# Altium PCB ES_Class6C_2L.PcbDoc
Units mm, origin at the board's own origin, x right, y up, seen from the top; angles counter-clockwise.
Board outline 254 x 254 mm, 2 copper layers (Top Layer, Bottom Layer), stack 1.5 mm thick; 279 components, 144 nets, 798 pads, 0 vias.
Unrouted connection lines stored in the file: 640.
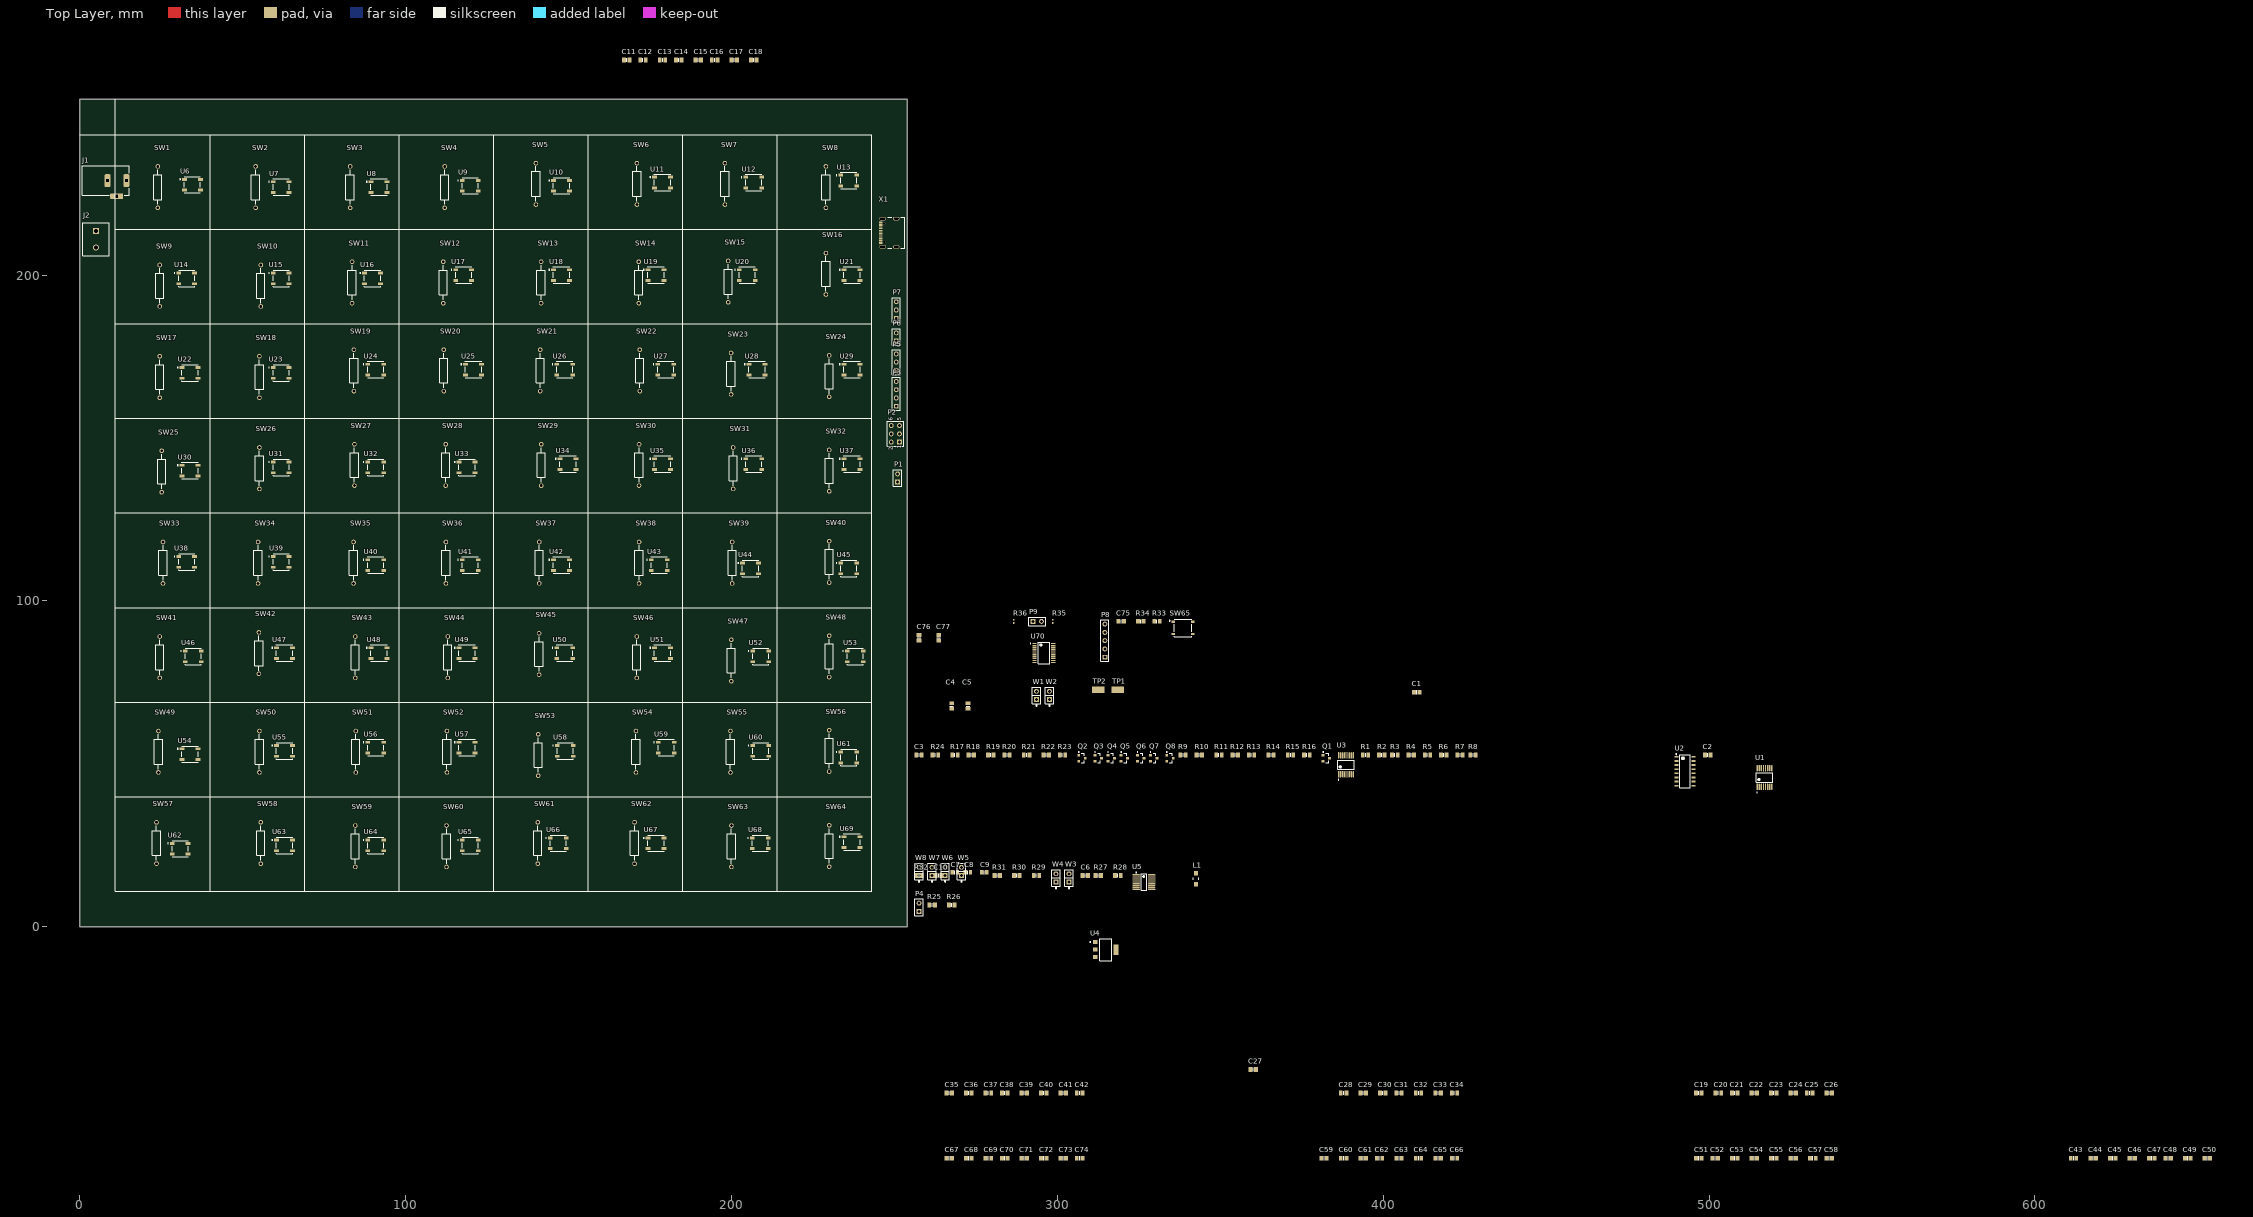
[diagram p0: Top Layer view]
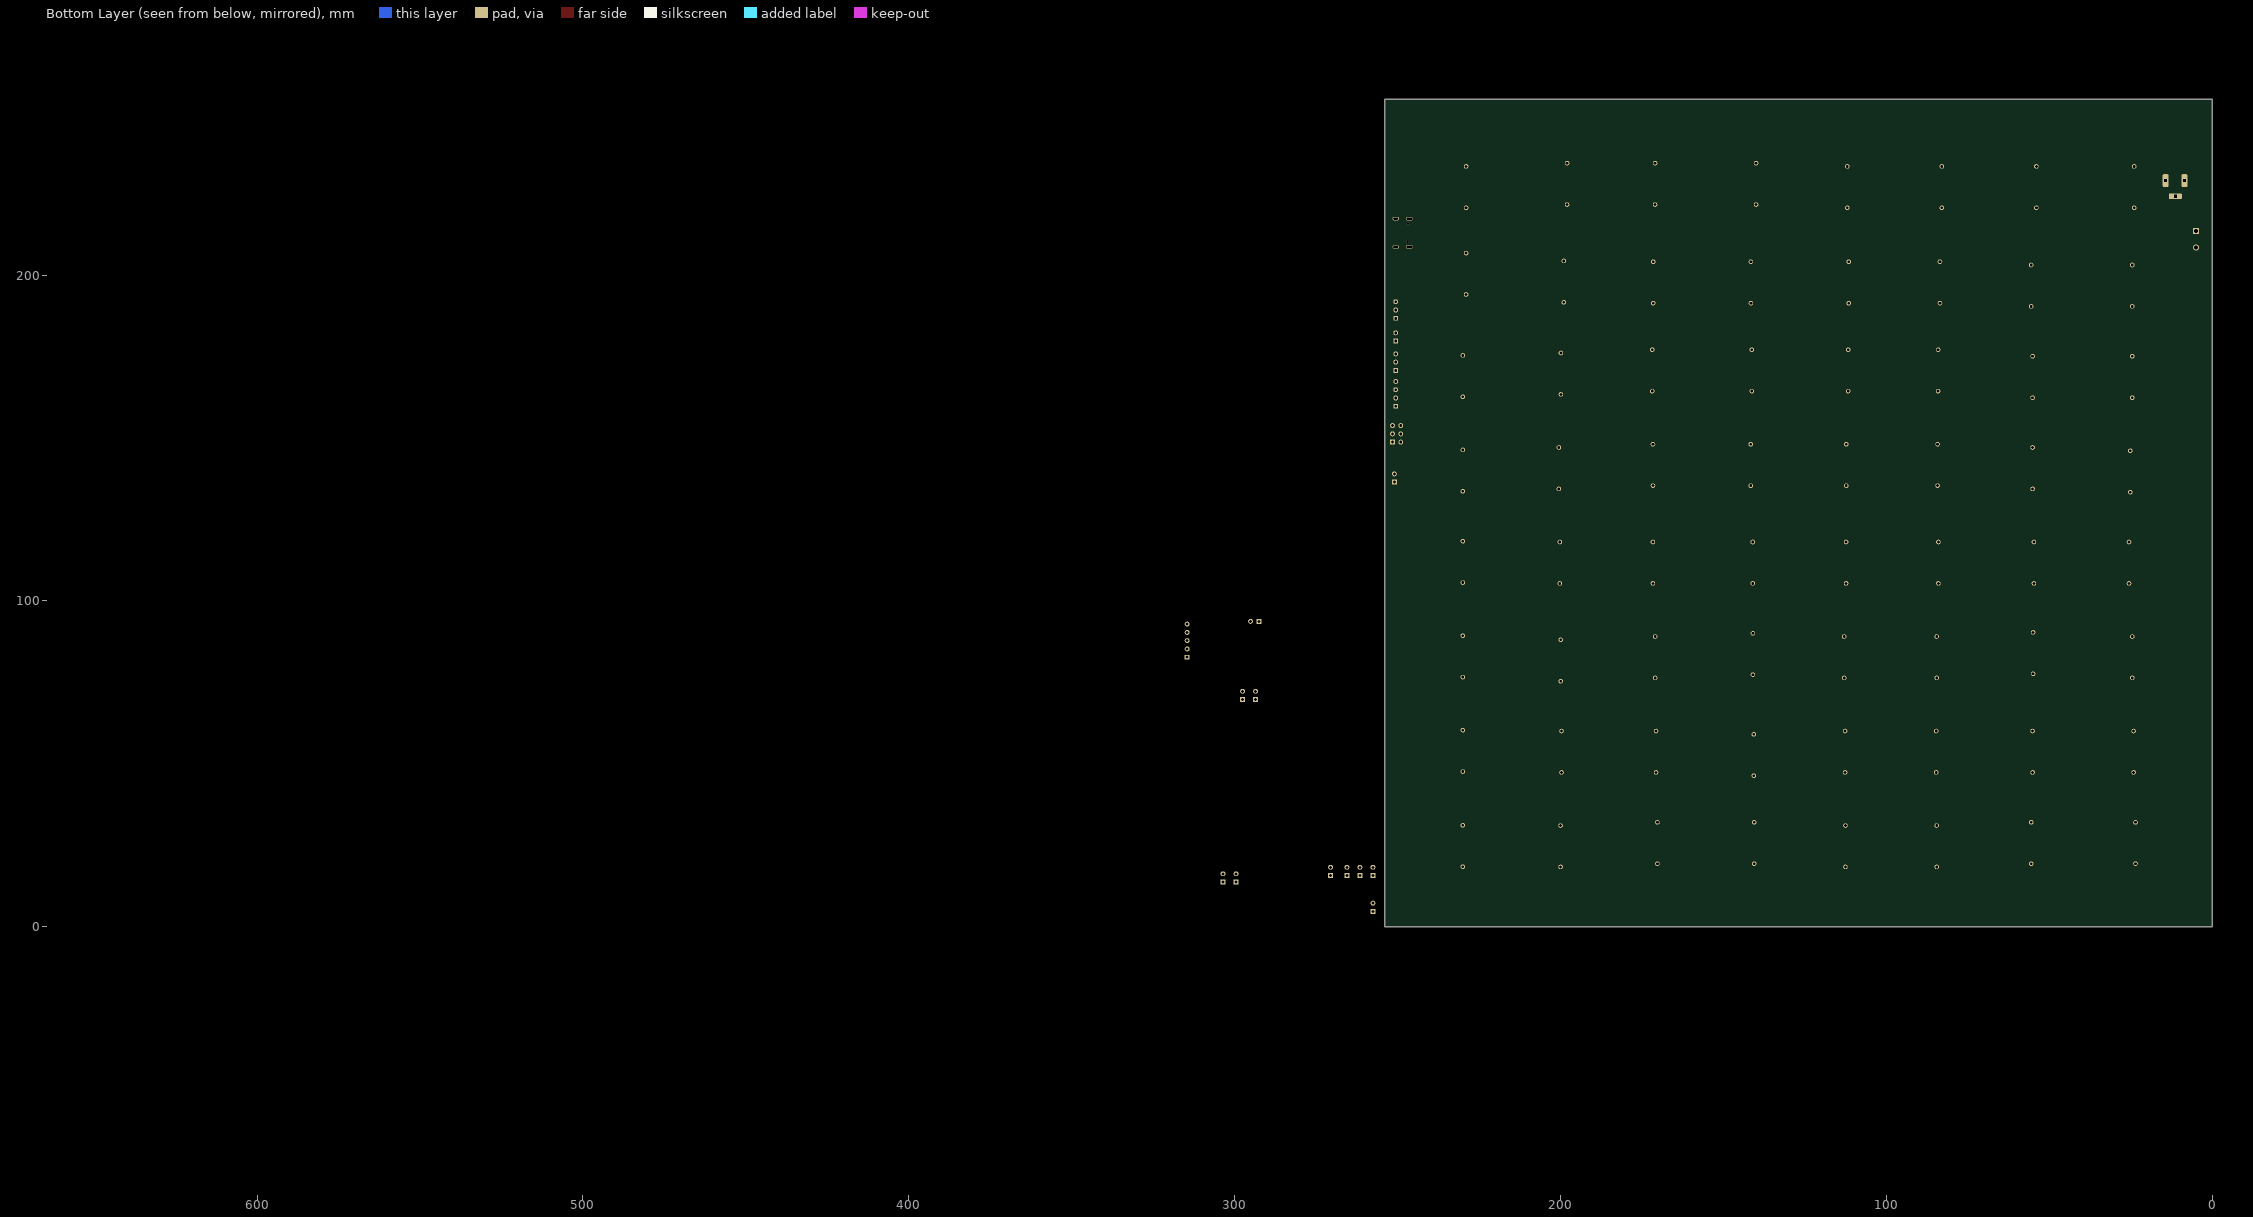
[diagram p1: Bottom Layer view, seen from below]

## Layer stack, top to bottom
Top Solder: solder mask 0.0102, Solder Resist, Dk 3.5
Top Layer: signal copper 0.035
Dielectric 1: prepreg 0.36, PP-001, Dk 3.9
Dielectric1: core 0.71, FR-4, Dk 4.8
Dielectric 2: prepreg 0.36, PP-001, Dk 3.9
Bottom Layer: signal copper 0.035
Bottom Solder: solder mask 0.0102, Solder Resist, Dk 3.5

## Board outline
0,0 254,0 254,254 0,254

## Design rules (kind name [scope] priority, off if disabled: settings)
BoardOutlineClearance [All] p1 off: gap=0.25 ignorepadtopadclearanceinfootprint=FALSE except(0: Arc-SplitContinuation Track-SplitContinuation SMDPad-SplitContinuation THPad-SplitContinuation Via-SplitContinuation Fill-SplitContinuation Poly-SplitContinuation Region-SplitContinuation Text-SplitContinuation)
Clearance Clearance-xPP-xTP-xTT [All] p1: gap=0.151 ignorepadtopadclearanceinfootprint=FALSE
ComponentClearance [All] p1: gap=0.25 collisioncheckmode=3 verticalgap=0.25 showdistances=FALSE
DiffPairsRouting [All] p1: maxlimit=0.25 minlimit=0.25 mostfreqgap=0.25 toplayer_minwidth=0.2 toplayer_maxwidth=0.381 toplayer_prefwidth=0.381 bottomlayer_minwidth=0.2 bottomlayer_maxwidth=0.381 bottomlayer_prefwidth=0.381 maxuncoupledlength=12.5
Height [All] p1: minheight=0 maxheight=25 prefheight=12.5
HoleSize HoleSize-PTH [All] p1: absolutevalues=TRUE maxlimit=10 minlimit=0.25 maxpercent=80.000 minpercent=20.000
HoleToHoleClearance [All] p1: gap=0.35 allowstackedmicrovias=TRUE
MinimumAnnularRing "Minimum IAR  >0.45mm" [((ObjectKind = 'Pad') OR (ObjectKind = 'Via')) And (Layer = 'MultiLayer') And (HoleDiameter > AsMM(0.45))] p1: minimumring=0.175 // minimum inner annular ring for pads > 0.45mm finished hole size
MinimumAnnularRing "Minimum IAR <=0.45mm" [((ObjectKind = 'Pad') OR (ObjectKind = 'Via')) And (Layer = 'MultiLayer') And (HoleDiameter <= AsMM(0.45))] p2: minimumring=0.175 // minimum inner annular ring for pads <= 0.45mm finished hole size
MinimumSolderMaskSliver [All] p1: minsoldermaskwidth=0.08
PasteMaskExpansion [All] p1: expansion=-0.025
PlaneClearance PlaneClearance-IPI [All] p1: clearance=0.25
PlaneConnect [All] p1: planeconnectstyle=Relief reliefexpansion=0.175 reliefentries=4 reliefconductorwidth=0.2 reliefairgap=0.2
PolygonConnect DirectVia [All vs IsNamedPolygon('GND_L01_P005') Or IsNamedPolygon('+3V3_L02_P000') Or IsNamedPolygon('GND_L03_P006') Or IsNamedPolygon('GND_L04_P008')] p1: thpad.connectstyle=Relief thpad.reliefconductorwidth=0.3 thpad.reliefentries=4 thpad.polygonreliefangle="90 Angle" thpad.airgapwidth=0.254 smdpad.connectstyle=Relief smdpad.reliefconductorwidth=0.3 smdpad.reliefentries=4 smdpad.polygonreliefangle="90 Angle" smdpad.airgapwidth=0.254 via.connectstyle=Direct via.reliefconductorwidth=0.254 via.reliefentries=4 via.polygonreliefangle="90 Angle" via.airgapwidth=0.254
PolygonConnect PolygonConnect-xTW [All] p2: connectstyle=Relief reliefconductorwidth=0.3 reliefentries=4 polygonreliefangle="90 Angle" airgapwidth=0.2
RoutingCorners [All] p1: cornerstyle=45-Degree minsetback=2.5 maxsetback=2.5
RoutingVias RoutingViasES [All] p1: holewidth=0.3 width=0.65 viastyle="Through Hole" minholewidth=0.25 minwidth=0.61 maxholewidth=0.45 maxwidth=0.8 // finishet hole size <= 0.45mm
SilkToSilkClearance [All] p1 off: silktosilkclearance=0.2
SilkToSolderMaskClearance SilkscreenOverComponentPads [IsPad] p1: minsilkscreentomaskgap=0.2 clearancetoexposedcopper=TRUE
SolderMaskExpansion [All] p1: expansion=0 istentingtop=FALSE
UnRoutedNet [All] p1: checkbadconnections=TRUE
Width Width-xTW [All] p1: maxlimit=1.5 minlimit=0.15 preferedwidth=0.2
17 further rules are at their usual default settings.

## Classes and differential pairs
component class U_uc: C75 P9 R34 R35 R36 SW65 U70 W5 W6 W7 W8
component class U_supply: C4 C5 J1 J2 P1 TP1 TP2 U4 W1 W2
component class U_matrix: C1 C2 C3 Q1 Q2 Q3 Q4 Q5 Q6 Q7 Q8 R1 R2 R3 R4 R5 R6 R7 R8 R9 R10 R11 R12 R13 R14 R15 R16 R17 R18 R19 R20 R21 R22 R23 R24 SW1 SW2 SW3 SW4 SW5 SW6 SW7 SW8 SW9 SW10 SW11 SW12 SW13 SW14 SW15 SW16 SW17 SW18 SW19 SW20 SW21 SW22 SW23 SW24 SW25 SW26 SW27 SW28 SW29 SW30 SW31 SW32 SW33 SW34 SW35 SW36 SW37 SW38 SW39 SW40 SW41 SW42 SW43 SW44 SW45 SW46 SW47 SW48 SW49 SW50 SW51 SW52 SW53 SW54 SW55 SW56 SW57 SW58 SW59 SW60 SW61 SW62 SW63 SW64 U1 U2 U3
component class U_leds: C11 C12 C13 C14 C15 C16 C17 C18 C19 C20 C21 C22 C23 C24 C25 C26 C27 C28 C29 C30 C31 C32 C33 C34 C35 C36 C37 C38 C39 C40 C41 C42 C43 C44 C45 C46 C47 C48 C49 C50 C51 C52 C53 C54 C55 C56 C57 C58 C59 C60 C61 C62 C63 C64 C65 C66 C67 C68 C69 C70 C71 C72 C73 C74 U6 U7 U8 U9 U10 U11 U12 U13 U14 U15 U16 U17 U18 U19 U20 U21 U22 U23 U24 U25 U26 U27 U28 U29 U30 U31 U32 U33 U34 U35 U36 U37 U38 U39 U40 U41 U42 U43 U44 U45 U46 U47 U48 U49 U50 U51 U52 U53 U54 U55 U56 U57 U58 U59 U60 U61 U62 U63 U64 U65 U66 U67 U68 U69
component class U_connector: C6 C7 C8 C9 C10 L1 P2 P3 P6 P9 R27 R34 R35 U5 W3 W4 X1
differential pair D: +D_P -D_N
differential pair DR: +DR_P -DR_N

## Components (designator, comment, footprint, x,y, rotation, side; value= is the part's Value field where it differs from the comment)
C1 "100nF" Cap_0805 410.28,72 r0 top
C2 "100nF" Cap_0805 499.58,52.746 r0 top
C3 "100nF" Cap_0805 257.58,52.746 r0 top
C4 "Cap" Cap_0805 267.58,67.746 r90 top value=100nF
C5 "Cap" Cap_0805 272.58,67.746 r90 top value=10uF
C6 "100nF" Cap_0805 308.58,15.746 r0 top
C7 "10nF" 6-0805_L 268.58,16.746 r0 top
C8 "47pF" 6-0805_L 272.58,16.746 r0 top
C9 "47pF" 6-0805_L 277.58,16.746 r0 top
C10 "10nF" Cap_0805 263.58,15.746 r0 top
C11 "100nF" Cap_0805 167.85,266 r0 top
C12 "100nF" Cap_0805 172.85,266 r0 top
C13 "100nF" Cap_0805 178.85,266 r0 top
C14 "100nF" Cap_0805 183.85,266 r0 top
C15 "100nF" Cap_0805 189.85,266 r0 top
C16 "100nF" Cap_0805 194.85,266 r0 top
C17 "100nF" Cap_0805 200.85,266 r0 top
C18 "100nF" Cap_0805 206.85,266 r0 top
C19 "100nF" Cap_0805 496.85,-51 r0 top
C20 "100nF" Cap_0805 502.85,-51 r0 top
C21 "100nF" Cap_0805 507.85,-51 r0 top
C22 "100nF" Cap_0805 513.85,-51 r0 top
C23 "100nF" Cap_0805 519.85,-51 r0 top
C24 "100nF" Cap_0805 525.85,-51 r0 top
C25 "100nF" Cap_0805 530.85,-51 r0 top
C26 "100nF" Cap_0805 536.85,-51 r0 top
C27 "100nF" Cap_0805 360.12,-43.746 r0 top
C28 "100nF" Cap_0805 387.85,-51 r0 top
C29 "100nF" Cap_0805 393.85,-51 r0 top
C30 "100nF" Cap_0805 399.85,-51 r0 top
C31 "100nF" Cap_0805 404.85,-51 r0 top
C32 "100nF" Cap_0805 410.85,-51 r0 top
C33 "100nF" Cap_0805 416.85,-51 r0 top
C34 "100nF" Cap_0805 421.85,-51 r0 top
C35 "100nF" Cap_0805 266.85,-51 r0 top
C36 "100nF" Cap_0805 272.85,-51 r0 top
C37 "100nF" Cap_0805 278.85,-51 r0 top
C38 "100nF" Cap_0805 283.85,-51 r0 top
C39 "100nF" Cap_0805 289.85,-51 r0 top
C40 "100nF" Cap_0805 295.85,-51 r0 top
C41 "100nF" Cap_0805 301.85,-51 r0 top
C42 "100nF" Cap_0805 306.85,-51 r0 top
C43 "100nF" Cap_0805 611.85,-71 r0 top
C44 "100nF" Cap_0805 617.85,-71 r0 top
C45 "100nF" Cap_0805 623.85,-71 r0 top
C46 "100nF" Cap_0805 629.85,-71 r0 top
C47 "100nF" Cap_0805 635.85,-71 r0 top
C48 "100nF" Cap_0805 640.85,-71 r0 top
C49 "100nF" Cap_0805 646.85,-71 r0 top
C50 "100nF" Cap_0805 652.85,-71 r0 top
C51 "100nF" Cap_0805 496.85,-71 r0 top
C52 "100nF" Cap_0805 501.85,-71 r0 top
C53 "100nF" Cap_0805 507.85,-71 r0 top
C54 "100nF" Cap_0805 513.85,-71 r0 top
C55 "100nF" Cap_0805 519.85,-71 r0 top
C56 "100nF" Cap_0805 525.85,-71 r0 top
C57 "100nF" Cap_0805 531.85,-71 r0 top
C58 "100nF" Cap_0805 536.85,-71 r0 top
C59 "100nF" Cap_0805 381.85,-71 r0 top
C60 "100nF" Cap_0805 387.85,-71 r0 top
C61 "100nF" Cap_0805 393.85,-71 r0 top
C62 "100nF" Cap_0805 398.85,-71 r0 top
C63 "100nF" Cap_0805 404.85,-71 r0 top
C64 "100nF" Cap_0805 410.85,-71 r0 top
C65 "100nF" Cap_0805 416.85,-71 r0 top
C66 "100nF" Cap_0805 421.85,-71 r0 top
C67 "100nF" Cap_0805 266.85,-71 r0 top
C68 "100nF" Cap_0805 272.85,-71 r0 top
C69 "100nF" Cap_0805 278.85,-71 r0 top
C70 "100nF" Cap_0805 283.85,-71 r0 top
C71 "100nF" Cap_0805 289.85,-71 r0 top
C72 "100nF" Cap_0805 295.85,-71 r0 top
C73 "100nF" Cap_0805 301.85,-71 r0 top
C74 "100nF" Cap_0805 306.85,-71 r0 top
C75 "100nF" Cap_0805 319.58,93.746 r0 top
C76 "Cap" Cap_0805 257.58,88.746 r90 top value=0.1uF
C77 "Cap" Cap_0805 263.58,88.746 r90 top value=10uF
J1 "694106301002" 694106301002 8,229 r270 top
J2 "1729128" PHOE-1729128-2_V 5,211 r270 top
L1 "742792133" SMD-1206 342.58,14.746 r90 top
P1 "Header 2" HDR1X2 251,136.46 r90 top
P2 "Header 3X2" HDR2X3 251.58,148.746 r90 top
P3 "Header 4" HDR1X4 250.58,159.746 r90 top
P4 "Header 2" HDR1X2 257.58,4.746 r90 top
P5 "Header 3" HDR1X3 250.58,170.746 r90 top
P6 "Header 2" HDR1X2 250.58,179.746 r90 top
P7 "Header 3" HDR1X3 250.58,186.746 r90 top
P8 "Header 5" HDR1X5 314.58,82.746 r90 top
P9 "Header 2" HDR1X2 292.58,93.746 r0 top
Q1 "BSS138LT1G" ONSC-SOT-23-3-318-08_V 382.58,51.746 r0 top
Q2 "BSS138LT1G" ONSC-SOT-23-3-318-08_V 307.58,51.746 r0 top
Q3 "BSS138LT1G" ONSC-SOT-23-3-318-08_V 312.58,51.746 r0 top
Q4 "BSS138LT1G" ONSC-SOT-23-3-318-08_V 316.58,51.746 r0 top
Q5 "BSS138LT1G" ONSC-SOT-23-3-318-08_V 320.58,51.746 r0 top
Q6 "BSS138LT1G" ONSC-SOT-23-3-318-08_V 325.58,51.746 r0 top
Q7 "BSS138LT1G" ONSC-SOT-23-3-318-08_V 329.58,51.746 r0 top
Q8 "BSS138LT1G" ONSC-SOT-23-3-318-08_V 334.58,51.746 r0 top
R1 "430R" RES_0805 394.58,52.746 r0 top value=180R
R2 "430R" RES_0805 399.58,52.746 r0 top value=180R
R3 "430R" RES_0805 403.58,52.746 r0 top value=180R
R4 "430R" RES_0805 408.58,52.746 r0 top value=180R
R5 "430R" RES_0805 413.58,52.746 r0 top value=180R
R6 "430R" RES_0805 418.58,52.746 r0 top value=180R
R7 "430R" RES_0805 423.58,52.746 r0 top value=180R
R8 "430R" RES_0805 427.58,52.746 r0 top value=180R
R9 "430R" RES_0805 338.58,52.746 r0 top
R10 "430R" RES_0805 343.58,52.746 r0 top
R11 "430R" RES_0805 349.58,52.746 r0 top
R12 "430R" RES_0805 354.58,52.746 r0 top
R13 "430R" RES_0805 359.58,52.746 r0 top
R14 "430R" RES_0805 365.58,52.746 r0 top
R15 "430R" RES_0805 371.58,52.746 r0 top
R16 "430R" RES_0805 376.58,52.746 r0 top
R17 "10k" RES_0805 268.58,52.746 r0 top value=47k
R18 "10k" RES_0805 273.58,52.746 r0 top value=47k
R19 "10k" RES_0805 279.58,52.746 r0 top value=47k
R20 "10k" RES_0805 284.58,52.746 r0 top value=47k
R21 "10k" RES_0805 290.58,52.746 r0 top value=47k
R22 "10k" RES_0805 296.58,52.746 r0 top value=47k
R23 "10k" RES_0805 301.58,52.746 r0 top value=47k
R24 "10k" RES_0805 262.58,52.746 r0 top value=47k
R25 "5k1" RES_0805 261.58,6.746 r0 top value=4k7
R26 "5k1" RES_0805 267.58,6.746 r0 top value=4k7
R27 "5k1" RES_0805 312.58,15.746 r0 top
R28 "5k1" RES_0805 318.58,15.746 r0 top
R29 "27R" RES_0805 293.58,15.746 r0 top
R30 "27R" RES_0805 287.58,15.746 r0 top
R31 "10k" RES_0805 281.58,15.746 r0 top
R32 "15k" RES_0805 257.58,15.746 r0 top
R33 "47k" RES_0805 330.58,93.746 r0 top value=1K
R34 "1k" RES_0805 325.58,93.746 r0 top value=1K
R35 "Res2" 0402 298.58,93.746 r90 top value=10k
R36 "Res2" 0402 286.58,93.746 r90 top value=10k
SW1 "reed" reed 24,227 r90 top
SW2 "reed" reed 54,227 r90 top
SW3 "reed" reed 83,227 r90 top
SW4 "reed" reed 112,227 r90 top
SW5 "reed" reed 140,228 r90 top
SW6 "reed" reed 171,228 r90 top
SW7 "reed" reed 198,228 r90 top
SW8 "reed" reed 229,227 r90 top
SW9 "reed" reed 24.581,196.746 r90 top
SW10 "reed" reed 55.581,196.746 r90 top
SW11 "reed" reed 83.581,197.746 r90 top
SW12 "reed" reed 111.581,197.746 r90 top
SW13 "reed" reed 141.581,197.746 r90 top
SW14 "reed" reed 171.581,197.746 r90 top
SW15 "reed" reed 199,198 r90 top
SW16 "reed" reed 229,200.396 r90 top
SW17 "reed" reed 24.581,168.746 r90 top
SW18 "reed" reed 55.161,168.746 r90 top
SW19 "reed" reed 84.161,170.746 r90 top
SW20 "reed" reed 111.742,170.746 r90 top
SW21 "reed" reed 141.322,170.746 r90 top
SW22 "reed" reed 171.903,170.746 r90 top
SW23 "reed" reed 199.903,169.746 r90 top
SW24 "reed" reed 230,169 r90 top
SW25 "reed" reed 25.161,139.746 r90 top
SW26 "reed" reed 55.161,140.746 r90 top
SW27 "reed" reed 84.322,141.746 r90 top
SW28 "reed" reed 112.322,141.746 r90 top
SW29 "reed" reed 141.644,141.746 r90 top
SW30 "reed" reed 171.644,141.746 r90 top
SW31 "reed" reed 200.547,140.746 r90 top
SW32 "reed" reed 230,140 r90 top
SW33 "reed" reed 25.58,111.746 r90 top
SW34 "reed" reed 54.741,111.746 r90 top
SW35 "reed" reed 84.064,111.746 r90 top
SW36 "reed" reed 112.386,111.746 r90 top
SW37 "reed" reed 141.03,111.746 r90 top
SW38 "reed" reed 171.675,111.746 r90 top
SW39 "reed" reed 200.222,111.746 r90 top
SW40 "reed" reed 230,112 r90 top
SW41 "reed" reed 24.58,82.746 r90 top
SW42 "reed" reed 55,84 r90 top
SW43 "reed" reed 84.58,82.746 r90 top
SW44 "reed" reed 112.966,82.746 r90 top
SW45 "reed" reed 140.966,83.746 r90 top
SW46 "reed" reed 170.966,82.746 r90 top
SW47 "reed" reed 199.966,81.746 r90 top
SW48 "reed" reed 230,83 r90 top
SW49 "reed" reed 24.161,53.746 r90 top
SW50 "reed" reed 55.161,53.746 r90 top
SW51 "reed" reed 84.741,53.746 r90 top
SW52 "reed" reed 112.708,53.746 r90 top
SW53 "reed" reed 140.708,52.746 r90 top
SW54 "reed" reed 170.708,53.746 r90 top
SW55 "reed" reed 199.708,53.746 r90 top
SW56 "reed" reed 230,54 r90 top
SW57 "reed" reed 23.58,25.746 r90 top
SW58 "reed" reed 55.58,25.746 r90 top
SW59 "reed" reed 84.58,24.746 r90 top
SW60 "reed" reed 112.58,24.746 r90 top
SW61 "reed" reed 140.58,25.746 r90 top
SW62 "reed" reed 170.288,25.746 r90 top
SW63 "reed" reed 199.995,24.746 r90 top
SW64 "reed" reed 230,24.83 r90 top
SW65 "PTS526SK15SMTR2LFS" FP-PTS526SK15SMTR2LFS-MFG 338.58,91.746 r0 top
TP1 "3v3" KSTN-5019_V 318.58,72.746 r0 top
TP2 "Vin" KSTN-5019_V 312.58,72.746 r0 top
U1 "CD74HC238PWR" FP-PW0016A-IPC_A 517,45.841 r90 top
U2 "SN74HC251DR" D0016A_L 492.58,47.746 r0 top
U3 "CD74HC238PWR" FP-PW0016A-IPC_A 388.58,49.746 r90 top
U4 "LD1117S33CTR" FP-SOT-223-0046067_14-MFG 314.85,-7 r0 top
U5 "FT230XS-U" SSOP-16_N 326.58,13.746 r0 top
U6 "1655" ADA-RGB-1655_V 34.58,227.746 r0 top
U7 "1655" ADA-RGB-1655_V 61.85,227 r0 top
U8 "1655" ADA-RGB-1655_V 91.85,227 r0 top
U9 "1655" ADA-RGB-1655_V 119.85,227.396 r0 top
U10 "1655" ADA-RGB-1655_V 147.85,227.396 r0 top
U11 "1655" ADA-RGB-1655_V 178.85,228.396 r0 top
U12 "1655" ADA-RGB-1655_V 206.85,228.396 r0 top
U13 "1655" ADA-RGB-1655_V 236,229 r0 top
U14 "1655" ADA-RGB-1655_V 32.85,199 r0 top
U15 "1655" ADA-RGB-1655_V 61.85,199 r0 top
U16 "1655" ADA-RGB-1655_V 89.85,199 r0 top
U17 "1655" ADA-RGB-1655_V 117.85,200 r0 top
U18 "1655" ADA-RGB-1655_V 147.85,200 r0 top
U19 "1655" ADA-RGB-1655_V 176.85,200 r0 top
U20 "1655" ADA-RGB-1655_V 204.85,200 r0 top
U21 "1655" ADA-RGB-1655_V 237,200 r0 top
U22 "1655" ADA-RGB-1655_V 33.85,170 r0 top
U23 "1655" ADA-RGB-1655_V 61.85,170 r0 top
U24 "1655" ADA-RGB-1655_V 90.85,171 r0 top
U25 "1655" ADA-RGB-1655_V 120.85,171 r0 top
U26 "1655" ADA-RGB-1655_V 148.85,171 r0 top
U27 "1655" ADA-RGB-1655_V 179.85,171 r0 top
U28 "1655" ADA-RGB-1655_V 207.85,171 r0 top
U29 "1655" ADA-RGB-1655_V 237,171 r0 top
U30 "1655" ADA-RGB-1655_V 33.85,140 r0 top
U31 "1655" ADA-RGB-1655_V 61.85,141 r0 top
U32 "1655" ADA-RGB-1655_V 90.85,141 r0 top
U33 "1655" ADA-RGB-1655_V 118.85,141 r0 top
U34 "1655" ADA-RGB-1655_V 149.85,142 r0 top
U35 "1655" ADA-RGB-1655_V 178.85,142 r0 top
U36 "1655" ADA-RGB-1655_V 206.85,142 r0 top
U37 "1655" ADA-RGB-1655_V 237,142 r0 top
U38 "1655" ADA-RGB-1655_V 32.85,112 r0 top
U39 "1655" ADA-RGB-1655_V 61.85,112 r0 top
U40 "1655" ADA-RGB-1655_V 90.85,111 r0 top
U41 "1655" ADA-RGB-1655_V 119.85,111 r0 top
U42 "1655" ADA-RGB-1655_V 147.85,111 r0 top
U43 "1655" ADA-RGB-1655_V 177.85,111 r0 top
U44 "1655" ADA-RGB-1655_V 205.85,110 r0 top
U45 "1655" ADA-RGB-1655_V 236,110 r0 top
U46 "1655" ADA-RGB-1655_V 34.85,83 r0 top
U47 "1655" ADA-RGB-1655_V 62.85,84 r0 top
U48 "1655" ADA-RGB-1655_V 91.85,84 r0 top
U49 "1655" ADA-RGB-1655_V 118.85,84 r0 top
U50 "1655" ADA-RGB-1655_V 148.85,84 r0 top
U51 "1655" ADA-RGB-1655_V 178.85,84 r0 top
U52 "1655" ADA-RGB-1655_V 209,83 r0 top
U53 "1655" ADA-RGB-1655_V 238,83 r0 top
U54 "1655" ADA-RGB-1655_V 33.85,53 r0 top
U55 "1655" ADA-RGB-1655_V 62.85,54 r0 top
U56 "1655" ADA-RGB-1655_V 90.85,55 r0 top
U57 "1655" ADA-RGB-1655_V 118.85,55 r0 top
U58 "1655" ADA-RGB-1655_V 149,54 r0 top
U59 "1655" ADA-RGB-1655_V 180,55 r0 top
U60 "1655" ADA-RGB-1655_V 209,54 r0 top
U61 "1655" ADA-RGB-1655_V 236,52 r0 top
U62 "1655" ADA-RGB-1655_V 30.85,24 r0 top
U63 "1655" ADA-RGB-1655_V 62.85,25 r0 top
U64 "1655" ADA-RGB-1655_V 90.85,25 r0 top
U65 "1655" ADA-RGB-1655_V 119.85,25 r0 top
U66 "1655" ADA-RGB-1655_V 146.85,25.65 r0 top
U67 "1655" ADA-RGB-1655_V 176.85,25.65 r0 top
U68 "1655" ADA-RGB-1655_V 208.85,25.65 r0 top
U69 "1655" ADA-RGB-1655_V 237,26 r0 top
U70 "STM32G030F6P6" FP-TSSOP20-YA-MFG 295.875,84.025 r0 top
W1 "Jumper" JUMPER 293.58,69.746 r90 top
W2 "Jumper" JUMPER 297.58,69.746 r90 top
W3 "Jumper" JUMPER 303.58,13.746 r90 top
W4 "Jumper" JUMPER 299.58,13.746 r90 top
W5 "Jumper" JUMPER 270.58,15.746 r90 top
W6 "Jumper" JUMPER 265.58,15.746 r90 top
W7 "Jumper" JUMPER 261.58,15.746 r90 top
W8 "Jumper" JUMPER 257.58,15.746 r90 top
X1 "USB4105-GF-A" GCT_USB4105-GF-A 250.58,213 r90 top

## Footprints (in the part's own frame and the unit in brackets; to place one, negate y for a bottom-side part, rotate by r counter-clockwise, add the part's x,y. Pads: shape width x height; smd on the part's side, far side on the other; paste and mask are expansions set on the pad)
6-0805_L [mm] "Chip Resistor, Body 2.0x1.2mm, IPC High Density"
  rect 1x1.3 smd: 1(-0.8,0) 2(0.8,0)
  silkscreen extent 0,-0.55 0,0.55, body extent -1.07,-0.7 1.07,0.7, height 0.7
0402 [mm] "Chip Capacitor, Body 1.0x0.5mm, IPC High Density"
  rect 0.6x0.5 smd: 1(-0.5,0) 2(0.5,0)
  body extent -0.55,-0.3 0.55,0.3, height 1.3
694106301002 [mm] "DC Power Jack Right Angled(6.4)"
  rrect50% 4x1.8 hole 0.8 square: 1(0,6.35) 2(0,0.55)
  rrect50% 1.8x4 hole 0.8 square: 3(4.8,3.35)
  silkscreen extent -4.5,-7.25 4.5,7.25, body extent -4.5,-7.25 5,7.25, height 10.75
ADA-RGB-1655_V [mm] "SMD, 4-Leads, Body 5x5mm"
  rect 1.5x0.9 smd: 1(-2.45,1.65) 2(-2.45,-1.65) 3(2.45,-1.65) 4(2.45,1.65)
  silkscreen extent -3.87,-2.5 2.5,2.5, body extent -2.7,-2.5 2.7,2.5, height 1.68
Cap_0805 [mm]
  rect 1.15x1.45 smd: 1(-0.85,0) 2(0.85,0)
  silkscreen extent 0,-0.55 0,0.55, body extent -0.95,-0.6 1.05,0.65, height 0.94
D0016A_L [mm] "SOIC, 16-Leads, Body 10x4mm, Pitch 1.27mm, IPC High Density"
  rrect18% 1.25x0.55 smd: 1(-2.625,4.445) 2(-2.625,3.175) 3(-2.625,1.905) 4(-2.625,0.635) 5(-2.625,-0.635) 6(-2.625,-1.905) 7(-2.625,-3.175) 8(-2.625,-4.445) 9(2.625,-4.445) 10(2.625,-3.175) 11(2.625,-1.905) 12(2.625,-0.635) 13(2.625,0.635) 14(2.625,1.905) 15(2.625,3.175) 16(2.625,4.445)
  silkscreen extent -2.75,-5 1.6,5.39, body extent -3,-4.95 3,4.95, height 1.59
FP-PTS526SK15SMTR2LFS-MFG [mm]
  rect 1x0.7 smd paste+0 mask+0: 1(-3,1.85) 2(3,1.85) 3(-3,-1.85) 4(3,-1.85)
  silkscreen extent -4.25,-2.7 2.7,2.7, body extent -3.6,-2.8 3.6,2.8, height 0.25
FP-PW0016A-IPC_A [mm]
  rect 1.955x0.421 smd paste+0 mask+0: 1(-2.875,2.275)
  rrect100% 1.955x0.421 smd paste+0 mask+0: 2(-2.875,1.625) 3(-2.875,0.975) 4(-2.875,0.325) 5(-2.875,-0.325) 6(-2.875,-0.975) 7(-2.875,-1.625) 8(-2.875,-2.275) 9(2.875,-2.275) 10(2.875,-1.625) 11(2.875,-0.975) 12(2.875,-0.325) 13(2.875,0.325) 14(2.875,0.975) 15(2.875,1.625) 16(2.875,2.275)
  silkscreen extent -4.73,-2.5 1.4,2.5, body extent -4.35,-3 4.35,3, height 0.25
FP-SOT-223-0046067_14-MFG [mm]
  rect 1.5x1.2 smd paste+0 mask+0: 1(-3.2,2.3) 2(-3.2,0) 3(-3.2,-2.3)
  rect 1.5x3.3 smd paste+0 mask+0: 4(3.2,0)
  silkscreen extent -4.82,-3.35 1.85,3.35, body extent -4.05,-3.45 4.05,3.45, height 0.25
FP-TSSOP20-YA-MFG [mm]
  rect 1.35x0.4 smd paste+0 mask+0: 1(-2.875,2.925) 2(-2.875,2.275) 3(-2.875,1.625) 4(-2.875,0.975) 5(-2.875,0.325) 6(-2.875,-0.325) 7(-2.875,-0.975) 8(-2.875,-1.625) 9(-2.875,-2.275) 10(-2.875,-2.925) 11(2.875,-2.925) 12(2.875,-2.275) 13(2.875,-1.625) 14(2.875,-0.975) 15(2.875,-0.325) 16(2.875,0.325) 17(2.875,0.975) 18(2.875,1.625) 19(2.875,2.275) 20(2.875,2.925)
  silkscreen extent -4.22,-3.3 1.75,3.3, body extent -3.65,-3.55 3.65,3.55, height 0.25
GCT_USB4105-GF-A [mm]
  rect 0.6x1.15 smd: A1B12(-3.2,4.755) A4B9(-2.4,4.755) B1A12(3.2,4.755) B4A9(2.4,4.755)
  rect 0.3x1.15 smd: A5(-1.25,4.755) A6(-0.25,4.755) A7(0.25,4.755) A8(1.25,4.755) B5(1.75,4.755) B6(0.75,4.755) B7(-0.75,4.755) B8(-1.75,4.755)
  oval 1.05x2.1 hole 0.6 slot 1.7 at 90 deg: S1(-4.32,4.18) S4(4.32,4.18)
  oval 1x2 hole 0.6 slot 1.4 at 90 deg: S2(-4.32,0) S3(4.32,0)
  round 0.65 hole 0.65 unplated: ""(-2.89,3.68) ""(2.89,3.68)
  silkscreen extent -4.79,-2.6 4.79,2.65, body extent -4.47,-2.59 4.47,5.11, height 3.26
HDR1X2 [mm] "Connector; Header; 2 Position"
  rect 1.5x1.5 hole 0.9: 1(0,0)
  round 1.5 hole 0.9: 2(2.54,0)
  silkscreen extent -1.27,-1.27 3.81,1.27
HDR1X3 [mm] "Connector; Header; 3 Position"
  rect 1.5x1.5 hole 0.9: 1(0,0)
  round 1.5 hole 0.9: 2(2.54,0) 3(5.08,0)
  silkscreen extent -1.27,-1.27 6.35,1.27
HDR1X4 [mm] "Connector; Header; 4 Position"
  rect 1.5x1.5 hole 0.9: 1(0,0)
  round 1.5 hole 0.9: 2(2.54,0) 3(5.08,0) 4(7.62,0)
  silkscreen extent -1.27,-1.27 8.89,1.27
HDR1X5 [mm] "Connector; Header; 5 Position"
  rect 1.5x1.5 hole 0.9: 1(0,0)
  round 1.5 hole 0.9: 2(2.54,0) 3(5.08,0) 4(7.62,0) 5(10.16,0)
  silkscreen extent -1.27,-1.27 11.43,1.27
HDR2X3 [mm] "Connector; Header; 3x2 Position"
  rect 1.5x1.5 hole 0.9: 1(0,0)
  round 1.5 hole 0.9: 2(0,2.54) 3(2.54,0) 4(2.54,2.54) 5(5.08,0) 6(5.08,2.54)
  silkscreen extent -1.27,-1.27 6.35,3.81
JUMPER [mm] "Connector; Header; 2 Position"
  rect 1.5x1.5 hole 0.9: 1(0,0)
  round 1.5 hole 0.9: 2(2.54,0)
  silkscreen extent -1.98,-1.27 3.81,1.27, body extent -1.33,-1.27 3.87,1.27, height 8.6
KSTN-5019_V [mm] "Test Point, 1-Leads, Body 3.81x2.03mm"
  rect 3.8x2.03 smd: 1(0,0)
  body extent -1.9,-1.01 1.9,1.02, height 2.29
ONSC-SOT-23-3-318-08_V [mm] "SOT23, 3-Leads, Body 2.92x1.3mm, Pitch 0.95mm"
  rect 0.9x0.8 smd: 1(-1,0.95) 2(-1,-0.95) 3(1,0)
  silkscreen extent -1.12,-1.46 0.65,2.02, body extent -0.65,-1.46 0.65,1.46, height 1.11
PHOE-1729128-2_V [mm] "Receptacle, 2-Leads, Body 8.1x10.16mm, Pitch 5.08mm"
  rect 1.8x1.8 hole 1.3: 1(-2.54,0)
  round 1.8 hole 1.3: 2(2.54,0)
  silkscreen extent -5.08,-4.05 5.08,4.05, body extent -5.65,-4.05 5.08,4.05, height 10.01
reed [mm]
  round 1.4 hole 0.85: 1(-6.35,0) 2(6.35,0)
  silkscreen extent -5.33,-1.27 5.33,1.27
RES_0805 [mm]
  rect 1.15x1.45 smd: 1(-0.85,0) 2(0.85,0)
  silkscreen extent 0,-0.55 0,0.55, body extent -0.97,-0.64 1.03,0.62, height 0.51
SMD-1206 [mm] "Chip Inductor, 2-Leads, Body 3.2x1.6mm"
  rect 1.35x1.2 smd: 1(-1.675,0) 2(1.675,0)
  silkscreen extent -0.35,-0.8 0.35,0.8, body extent -1.6,-0.8 1.6,0.8, height 1.09
SSOP-16_N [mm] "SOP, 16-Leads, Body 4.9x3.9mm, Pitch 0.635mm, IPC Medium Density"
  oval 2.25x0.4 smd: 1(-2.375,2.222) 2(-2.375,1.587) 3(-2.375,0.953) 4(-2.375,0.318) 5(-2.375,-0.318) 6(-2.375,-0.953) 7(-2.375,-1.587) 8(-2.375,-2.222) 9(2.375,-2.222) 10(2.375,-1.587) 11(2.375,-0.953) 12(2.375,-0.318) 13(2.375,0.318) 14(2.375,0.953) 15(2.375,1.587) 16(2.375,2.222)
  silkscreen extent -2.5,-2.5 0.9,3.1, body extent -1.99,-2.5 1.99,2.5, height 1.76

## Part data
C1 C2 C3 C6 C11 C12 C13 C14 C15 C16 C17 C18 C19 C20 C21 C22 C23 C24 C25 C26 C27 C28 C29 C30 C31 C32 C33 C34 C35 C36 C37 C38 C39 C40 C41 C42 C43 C44 C45 C46 C47 C48 C49 C50 C51 C52 C53 C54 C55 C56 C57 C58 C59 C60 C61 C62 C63 C64 C65 C66 C67 C68 C69 C70 C71 C72 C73 C74 C75: library part C, PCB Footprint=RC0805, SDTSourceLibName=C:\WINDOWS\TEMP\DA.LIB
C4 C5 C76 C77: "Capacitor", LatestRevisionDate=17-Jul-2002, LatestRevisionNote="Re-released for DXP Platform.", PackageDescription="Radial Cap, Thru-Hole; 2 Leads; 0.3 in Pin Spacing", PackageReference=RAD-0.3, Published=8-Jun-2000, Publisher="Altium Limited"
C7 C8 C9 C10: library part Cap, "Capacitor", LatestRevisionDate=17-Jul-2002, LatestRevisionNote="Re-released for DXP Platform.", PackageDescription="Radial Cap, Thru-Hole; 2 Leads; 0.3 in Pin Spacing", PackageReference=RAD-0.3, Published=8-Jun-2000, Publisher="Altium Limited"
J1: library part CMP-1502-00188-2, Color=Black, Current Rating=5A, Flammability Rating="UL94 V-0", Insulation Resistance=100MΩ, Max Operating Temperature=85°C, Min Operating Temperature=-40°C, Operating Supply Voltage=24V, Voltage Rating (DC)=20V, Connector Type=Power, Contact Gender=Female, Contact Material="Gold, Tin", Contact Plating=Tin, Gender=Male, Height=11mm, Housing Material=Polyamide, Mount="Through Hole", NexarPartId=52676100, Number of Contacts=3, Packaging=Bulk, REACH SVHC=Unknown, RoHS=Compliant, Shielding=Unshielded, Termination="Through Hole", Voltage Rating=24V
J2: library part CMP-2000-05815-1, "PCB Terminal Block, 13.5 A, 400 V, 2-Pin THD, RoHS, Bulk", Current Rating=13500mA, Manufacturer="Phoenix Contact", Package Description="2-Pin Through Hole Device, Body 8.1 x 10.16 mm, Pitch 5.08 mm", Package Reference=1729128-2, Package Version=03/2015, Voltage Rating=400V, Datasheet URL=https://datasheet.ciiva.com/16046/1729128-16046181.pdf, Datasheet Version=12/2013, Manufacturer URL=http://www.phoenixcontact.com/, Mounting Technology=ThroughHole, No. of Positions=2, No. of Rows=1, Orientation=Horizontal, Package URL=https://www.phoenixcontact.com/online/portal/pi/pxc/product_detail_page/!ut/p/b1/3VdJjqNKFDxLH8AFycySyWY2ozFsEPOMMQaDOX1XedGL_1Vdm5YXJleknhSKeBkvI6EA8ncAo3AYoDhBQGco6KN7VURTdemj9us_IEKEZo_YHiPAEWEFmDGOHMORkqKYCORBZxgL7ZoaZYcbFFUZ3fqxSY6GOuxydWUuHqz1ynmMFygu583Bob0Ewr6Sd_l-5m-kAueHiB0jpRwZwe58wwtkpxtMYd_LmGcDRU02dRNEyWt6Y2ti5pSyJ_reIkzIulrqApdnbT11V5jnCKbYNCvhEM1MCpPByat_X379-iThf08CI5GfOPqfBeS3BRoBOdD55AKVv0iLwCMq-2BrzXWSGRH7pUGD9uwXQjiph3xL0DKQwdGa0JImiIOmBNOestqgwTHSSs2oOep-78apyXQBvNi8ZLaFjvjWvcaUEBu0MC6Wbe-d6mB0FAebo2lUWinqYaZs5DAYzV0RP9yitUjnGJ0iI9xhZkT42OCQNUJJhkgWINNQLP2JFP6OpMg3JCVg70jqHT0lvKOnhHf0lPuOnnLf0VPuWx6_dxwUIvwk5WMkT0kLL1mh61l2yZVSzG3pYV_bqo-mj6uMKwKwdnnW8Jh5RTOJzMOA5c-eJDaZQw4mTMPH02PvS_ZAqNVjVTo2WyYLkwH_KU1mmmG5kjRhDqPXLwwVHvVOjCM60-fpXvTDfMGW1PVFVS1r4e4yVDk4ZdNbkUHvqPqQSeian4UD39fNKmachqdJ1NJbyk8rXT9mXTvPk3oE5meulKGgiruPJek-4I9hTT6G8ZLOyRSm2RRVbThERQad5OS28hdt4YW4vG0stgYYzsWsK4_7y6DZMjJSCqri1kyiZR5vD7pwIrNR7QwPHTcLTI5qT7eRlpHrdGiupYlqQDJ7zy_CND8fWWBoLRXxk1RVcXiBQwbTD4Xi7KL-FuO94t9xaqweXzH, Packing=Bulk, PartNumber=1729128, Pitch=5.08mm, RoHS=TRUE
L1: library part CMP-0220-00010-1, "SMD EMI Suppression Ferrite Bead WE-CBF, Z = 600 Ohm", ComponentLink1Description="Manufacturer Link", ComponentLink1URL=http://www.we-online.com, ComponentLink2Description=Datasheet, ComponentLink2URL=http://www.we-online.de/katalog/media/pdf/742792133.pdf, DatasheetVersion="ver 2, Aug-2007", Impedance="600 Ohm", PackageDescription="Chip Inductor, 2-Leads, Body 3.2 x 1.6 mm", PackageReference=SMD-1206, PackageVersion=2007
P1 P4 P6 P9: "Header, 2-Pin", LatestRevisionDate=17-Jul-2002, LatestRevisionNote="Re-released for DXP Platform.", Publisher="Altium Limited"
P2: "Header, 3-Pin, Dual row", LatestRevisionDate=17-Jul-2002, LatestRevisionNote="Re-released for DXP Platform.", Publisher="Altium Limited"
P3: "Header, 4-Pin", LatestRevisionDate=17-Jul-2002, LatestRevisionNote="Re-released for DXP Platform.", Publisher="Altium Limited"
P5 P7: "Header, 3-Pin", LatestRevisionDate=17-Jul-2002, LatestRevisionNote="Re-released for DXP Platform.", Publisher="Altium Limited"
P8: "Header, 5-Pin", LatestRevisionDate=17-Jul-2002, LatestRevisionNote="Re-released for DXP Platform.", Publisher="Altium Limited"
Q1 Q2 Q3 Q4 Q5 Q6 Q7 Q8: library part CMP-1058-00767-1, "Power MOSFET, 200 mA, 50 V, N-Channel, 3-Pin SOT-23, Pb-Free, Tape and Reel", Manufacturer="On Semiconductor", Package Type=SOT-23-3, Channel Polarity="N Channel", Ciss Typ (pF)=40, ComponentLink1Description="Manufacturer URL", ComponentLink1URL=http://www.onsemi.com/, ComponentLink2Description=Datasheet, ComponentLink2URL=http://www.onsemi.com/pub_link/Collateral/BSS138LT1-D.PDF, ComponentLink3Description="Package Specification", ComponentLink3URL=http://www.onsemi.cn/pub_link/Collateral/318-08.PDF, Configuration=Single, Coss Typ (pF)=12, Crss Typ (pF)=3.5, DatasheetVersion="Rev. 8", ID Max (A)=0.2, Mounting Technology="Surface Mount", PackageDescription="3-Pin Small Outline Transistor, Body 2.92 x 1.3 mm, Pitch 0.95 mm", PackageReference=SOT-23-3-318-08, PackageVersion="Rev. AP, 11/2009", Packing="Tape and Reel", PartNumber=BSS138LT1G, PD Max (W)=0.225, RoHS=Pb-Free, V(BR)DSS Min (V)=50, VGS Max (V)=20, VGS(th) Max (V)=1.5
R1 R2 R3 R4 R5 R6 R7 R8 R9 R10 R11 R12 R13 R14 R15 R16 R17 R18 R19 R20 R21 R22 R23 R24 R25 R26 R27 R28 R29 R30 R31 R32 R33 R34: library part Res2, "Res 0805", LatestRevisionDate=17-Jul-2002, LatestRevisionNote="Re-released for DXP Platform.", PackageDescription="Axial Device, Thru-Hole; 2 Leads; 0.4 in Pin Spacing", PackageReference=AXIAL-0.4, Published=8-Jun-2000, Publisher="Altium Limited"
R35 R36: "Resistor", LatestRevisionDate=17-Jul-2002, LatestRevisionNote="Re-released for DXP Platform.", PackageDescription="Axial Device, Thru-Hole; 2 Leads; 0.4 in Pin Spacing", PackageReference=AXIAL-0.4, Published=8-Jun-2000, Publisher="Altium Limited"
SW65: library part CMP-10040-000013-1, "TACT 5.2 X 5.2, 1.5 MM H, 260GF,", Contact Current Rating=50mA, Contact Resistance=100mΩ, Manufacturer=C&K, Operating Force=250gf, Temperature="-20°C to +70°C", Temperature Range High=+70°C, Temperature Range Low=-20°C, Voltage Rating Dc=12V, Automotive=No, Category=Switch, ComponentLink2Description=Datasheet, ComponentLink2URL=https://www.ckswitches.com/media/2780/pts526.pdf, Device Class L1=Electromechanical, Device Class L2=Switches, Device Class L3="Tactile Switches", Digikey Description="TACT 5.2 X 5.2, 1.5 MM H, 260GF,", Electromechanical Life=200000Cycles, Height=1.65mm, Lead Free=Yes, Manufacturer Part Number=PTS526SK15SMTR2LFS, Octopart=https://octopart.com/pts526+sk15+smtr2+lfs-c%26k+components-100617999, Package=PTS526SK15SMTR2LFS, RoHS=TRUE, Standoff Height=0mm, Throw Configuration=SPST-NO
TP1 TP2: library part CMP-1672-00008-1, "Test Point, 1 Position SMD, RoHS, Tape and Reel", Package Quantity=1000, ComponentLink1Description="Manufacturer URL", ComponentLink1URL=http://www.keyelco.com/, ComponentLink2Description=Datasheet, ComponentLink2URL=http://www.keyelco.com/product-pdf.cfm?p=1357, Contact Plating=Silver, DatasheetVersion=03/2014, Mount="Surface Mount", Mounting Technology="Surface Mount", PackageDescription="1-Pin Surface Mount Device, Body 3.81 x 2.03 mm", PackageReference=5019, Packaging="Tape and Reel", Pins=1, RoHSCompliant=True
U1 U3: library part CMP-1633-00899-3, "IC DECODER/DEMUX 1X3:8 16TSSOP", Case/Package=TSSOP, High Level Output Current=-5.2mA, Low Level Output Current=5.2mA, Max Frequency=28MHz, Max Operating Temperature=125°C, Max Supply Current=8uA, Max Supply Voltage=6V, Min Operating Temperature=-55°C, Min Supply Voltage=2V, Output Current=25mA, Package Quantity=2000, Bandwidth=28MHz, Contact Plating=Gold, Height=1.15mm, Independent Circuits=1, Lead Free="Lead Free", Length=5mm, Logic Function=Demultiplexer, Mount="Surface Mount", Number of Bits=8, Number of Channels=1, Number of Circuits=1, Number of Elements=1, Number of Input Lines=3, Number of Inputs=3, Number of Output Lines=8, Number of Outputs=8, Number of Pins=16, Output Voltage=6V, Packaging="Tape and Reel", Polarity=Non-Inverting, Propagation Delay=265ns, Quiescent Current=8uA, Radiation Hardening=No, REACH SVHC="No SVHC", Rise Time=400ns, RoHS Compliant=Yes, Series=74HC, Supply Type=Single, Technology=CMOS, Termination=SMD/SMT, Turn-On Delay Time=265ns, Weight=0.002183oz, Width=4.4mm
U2: library part CMP-1633-00067-2, "Data Selectors/Multiplexers With 3-State Outputs, D0016A, LARGE T&R", F @ Nom Voltage(Max)(Mhz)=28, Generic Part Number=SN74HC251, ICC @ Nom Voltage(Max)(mA)=0.08, Manufacturer="Texas Instruments", Operating Temperature Range(C)="-40 to 85", Rating=Catalog, tpd @ Nom Voltage(Max)(ns)=51, Voltage(Nom)(V)=3.3,5, Bits(#)=8, Channels(#)=1, Code_JEDEC="MS-012 variation AC", Configuration=8：1, DatasheetVersion=SCLS132E, Function=Encoder/Multiplexer, Input Type=LVTTL/CMOS, Output Drive (IOL/IOH)(Max)(mA)=7.8/-7.8, Output Type=CMOS, PackageReference=D0016A, Schmitt Trigger=No, Technology Family=HC, Type="3-State Output", VCC(Max)(V)=6, VCC(Min)(V)=2
U4: library part CMP-0244-00307-2, "IC REG LINEAR 3.3V 800MA SOT223", Case/Package=SOT-223, Dropout Voltage=1.1V, Input Bias Current=5mA, Max Input Voltage=15V, Max Operating Temperature=125°C, Max Output Current=1.3A, Max Output Voltage=3.3V, Max Power Dissipation=12W, Min Input Voltage=5.3V, Min Operating Temperature=-40°C, Output Current=950mA, Output Voltage Accuracy=1%, Package Quantity=1, Quiescent Current=10mA, Accuracy=1%, Contact Plating=Tin, Height=1.8mm, Lead Free="Lead Free", Length=6.5mm, Max Supply Voltage=15V, Min Output Voltage=3.3V, Min Supply Voltage=3.3V, Mount="Surface Mount", Nominal Output Voltage=3.3V, Number of Outputs=1, Number of Pins=4, Number of Regulators=1, Number of Terminals=4, Output Type=Fixed, Output Voltage=3.3V, Packaging="Tape and Reel", Polarity=Positive, Power Dissipation=12W, Radiation Hardening=No, REACH SVHC="No SVHC", Termination=SMD/SMT, Weight=0.01lb, Width=3.5mm
U5: library part CMP-0248-00025-2, "USB to Basic UART Interface Chip, UHCI/OHCI/EHCI Compatible, USB 2.0 Compatible, -40 to +85 degC, 16-Pin SSOP, Pb-Free, Tube", Manufacturer=FTDI, Code_JEDEC=MO-137-AB, ComponentLink1Description="Manufacturer URL", ComponentLink1URL=http://www.ftdichip.com/, ComponentLink2Description=Datasheet, ComponentLink2URL=http://www.ftdichip.com/Support/Documents/DataSheets/ICs/DS_FT230X.pdf, ComponentLink3Description="FT230X Product Page", ComponentLink3URL=www.ftdichip.com/Products/ICs/FT230X.html, DatasheetVersion="ver 1.2, Feb-2013", PackageDescription="16-Pin Small Outline Package, 8.6 x 3.9 mm Body, 0.635 mm Pitch", PackageReference=SSOP-16, PackageVersion=Feb-13, PartNumber=FT230XS-U, RevisionNote="DatasheetVersion updated to 1.2 Feb-2013"
U6 U7 U8 U9 U10 U11 U12 U13 U14 U15 U16 U17 U18 U19 U20 U21 U22 U23 U24 U25 U26 U27 U28 U29 U30 U31 U32 U33 U34 U35 U36 U37 U38 U39 U40 U41 U42 U43 U44 U45 U46 U47 U48 U49 U50 U51 U52 U53 U54 U55 U56 U57 U58 U59 U60 U61 U62 U63 U64 U65 U66 U67 U68 U69: library part CMP-2000-05026-1, "Intelligent Control LED Integrated Light Source, 3.5 to 5.3 V, -25 to 80 degC, 4-Pin SMD, RoHS, Tape and Reel", Color=Red,Green,Blue(RGB), Manufacturer=Adafruit-Industries-LLC, Package Description="4-Pin Surface Mount Device, Body 5 x 5 mm", Category=Optoelectronics, Configuration=Discrete, Controller Type=-, Datasheet URL=http://datasheet.octopart.com/ADA1655-Adafruit-Industries-datasheet-32028139.pdf, Datasheet Version=May-13, Family=Addressable,Specialty, Interface=-, Manufacturer URL=https://www.adafruit.com/, Mounting Type=SurfaceMount, Number of LEDs=10, Package Reference=1655, Series=Neopixel, Size / Dimension=5.00mmLx5.00mmW, Utilized LED=WS2812(5050)
U70: library part CMP-12105-000034-1, "ARM MICROCONTROLLERS - MCU", Ambient Temperature Range High=+85°C, Ambient Temperature Range Low=-40°C, Frequency=64MHz, Manufacturer=STMicroelectronics, Max Junction Temp=+105°C, Max Supply Voltage=3.6V, Min Supply Voltage=2V, Package=TSSOP20-YA, Temperature="-40°C to +85°C", Automotive=No, Category=IC, ComponentLink2Description=Datasheet, ComponentLink2URL=https://www.st.com/resource/en/datasheet/stm32g030f6.pdf, Core Architecture="ARM Cortex-M0+", Data Bus Width=32bits, Device Class L1="Integrated Circuits (ICs)", Device Class L2="Embedded Processors and Controllers", Device Class L3=Microcontrollers, Digikey Description="ARM MICROCONTROLLERS - MCU", Height=1.2mm, Interface=I2C,SPI,USART,LIN,IrDA,I2S,SMBus, Lead Free=Yes, Manufacturer Part Number=STM32G030F6P6, Memory Size=32KBytes, Memory Type=FLASH, Number Of A/D Converters=1, Number Of Adc Channels=16, Number Of Cores=1, Number Of I2C Channels=2, Number Of I/Os=17, Number Of Pwm Channels=11, Number Of Spi Channels=3, Number Of Timers/Counters=6, Number Of Uart Channels=2, Octopart=https://octopart.com/stm32g030f6p6-stmicroelectronics-103773023, Ram Size=8KBytes, RoHS=TRUE, Standoff Height=0.05mm, Temperature Range High=+85°C, Temperature Range Low=-40°C
W1 W2 W3 W4 W5 W6 W7 W8: "Jumper Wire", LatestRevisionDate=17-Jul-2002, LatestRevisionNote="Re-released for DXP Platform.", PackageDescription="Radial Cap, Thru-Hole; 2 Leads; 0.2 in Pin Spacing", PackageReference=RAD-0.2, Published=24-Mar-1999, Publisher="Altium Limited"
X1: library part "USB-C Type 2.0", "USB4105-GF-A USB connector", Supplier Part Number 1=C319148, ComponentLink1Description="LCSC  C319148", ComponentLink1URL=https://lcsc.com/product-detail/USB-Connectors_XKB-Connectivity-U262-161N-4BVC11_C319148.html, Supplier 1=LCSC

## Nets (pads, with @x,y where several pads share a name; then routed paths per layer and width w, separated by ;. In a path a pad name is that pad's centre, name@x,y a point inside that pad or via, vN(x,y) a via of type N, cw(c..) or ccw(c..) an arc to the next point about the centre after c; other vN are vias at no path point)
3V3: C1.1 C2.1 C3.1 C76.2 C77.2 P1.1 P2.1 P8.3 R25.2 R26.2 R33.1 R35.2 U1.6 U1.16 U2.16 U3.6 U3.16 W2.2 W5.1
5V: C11.1 C12.1 C13.1 C14.1 C15.1 C16.1 C17.1 C18.1 C19.1 C20.1 C21.1 C22.1 C23.1 C24.1 C25.1 C26.1 C27.1 C28.1 C29.1 C30.1 C31.1 C32.1 C33.1 C34.1 C35.1 C36.1 C37.1 C38.1 C39.1 C40.1 C41.1 C42.1 C43.1 C44.1 C45.1 C46.1 C47.1 C48.1 C49.1 C50.1 C51.1 C52.1 C53.1 C54.1 C55.1 C56.1 C57.1 C58.1 C59.1 C60.1 C61.1 C62.1 C63.1 C64.1 C65.1 C66.1 C67.1 C68.1 C69.1 C70.1 C71.1 C72.1 C73.1 C74.1 J1.1 J2.2 P2.3 U6.1 U7.1 U8.1 U9.1 U10.1 U11.1 U12.1 U13.1 U14.1 U15.1 U16.1 U17.1 U18.1 U19.1 U20.1 U21.1 U22.1 U23.1 U24.1 U25.1 U26.1 U27.1 U28.1 U29.1 U30.1 U31.1 U32.1 U33.1 U34.1 U35.1 U36.1 U37.1 U38.1 U39.1 U40.1 U41.1 U42.1 U43.1 U44.1 U45.1 U46.1 U47.1 U48.1 U49.1 U50.1 U51.1 U52.1 U53.1 U54.1 U55.1 U56.1 U57.1 U58.1 U59.1 U60.1 U61.1 U62.1 U63.1 U64.1 U65.1 U66.1 U67.1 U68.1 U69.1 W1.1
COL0: P5.1 U2.11 U3.1 U70.14
COL1: P5.2 U2.10 U3.2 U70.16
COL2: P5.3 U2.9 U3.3 U70.17
D_N: C9.2 R30.1 X1.A7 X1.B7
D_P: C8.2 R29.1 X1.A6 X1.B6
DOUT: P6.2 U6.4 U70.3
DR_N: R30.2 U5.9
DR_P: R29.2 U5.8
GND: C1.2 C2.2 C3.2 C4.1 C5.1 C6.2 C7.1 C8.1 C9.1 C10.1 C11.2 C12.2 C13.2 C14.2 C15.2 C16.2 C17.2 C18.2 C19.2 C20.2 C21.2 C22.2 C23.2 C24.2 C25.2 C26.2 C27.2 C28.2 C29.2 C30.2 C31.2 C32.2 C33.2 C34.2 C35.2 C36.2 C37.2 C38.2 C39.2 C40.2 C41.2 C42.2 C43.2 C44.2 C45.2 C46.2 C47.2 C48.2 C49.2 C50.2 C51.2 C52.2 C53.2 C54.2 C55.2 C56.2 C57.2 C58.2 C59.2 C60.2 C61.2 C62.2 C63.2 C64.2 C65.2 C66.2 C67.2 C68.2 C69.2 C70.2 C71.2 C72.2 C73.2 C74.2 C75.2 C76.1 C77.1 J1.2 J1.3 J2.1 P1.2 P2.2 P2.4 P2.6 P8.5 P9.1 Q1.2 Q2.2 Q3.2 Q4.2 Q5.2 Q6.2 Q7.2 Q8.2 R17.1 R18.1 R19.1 R20.1 R21.1 R22.1 R23.1 R24.1 R27.2 R28.2 R32.1 R36.1 SW65.3 SW65.4 U1.4 U1.5 U1.8 U2.7 U2.8 U3.4 U3.5 U3.8 U4.1 U5.5 U5.13 U6.3 U7.3 U8.3 U9.3 U10.3 U11.3 U12.3 U13.3 U14.3 U15.3 U16.3 U17.3 U18.3 U19.3 U20.3 U21.3 U22.3 U23.3 U24.3 U25.3 U26.3 U27.3 U28.3 U29.3 U30.3 U31.3 U32.3 U33.3 U34.3 U35.3 U36.3 U37.3 U38.3 U39.3 U40.3 U41.3 U42.3 U43.3 U44.3 U45.3 U46.3 U47.3 U48.3 U49.3 U50.3 U51.3 U52.3 U53.3 U54.3 U55.3 U56.3 U57.3 U58.3 U59.3 U60.3 U61.3 U62.3 U63.3 U64.3 U65.3 U66.3 U67.3 U68.3 U69.3 W8.2 X1.A1B12 X1.B1A12
I2C1_SCL: P4.1 R26.1 U70.20
I2C1_SDA: P4.2 R25.1 U70.2
NetC4_2: C4.2 TP2.1 U4.3 W1.2
NetC5_2: C5.2 TP1.1 U4.2 U4.4 W2.1
NetC6_1: C6.1 U5.3 U5.10
NetC7_2: C7.2 L1.2 X1.A4B9 X1.B4A9
NetC10_2: C10.2 R31.1 R32.2 U5.11
NetC75_1: C75.1 R33.2 R34.2 SW65.1 SW65.2
NetP9_2: P9.2 R35.1 U70.1
NetQ1_1: Q1.1 R16.1 R23.2
NetQ1_3: Q1.3 R8.2
NetQ2_1: Q2.1 R9.1 R24.2
NetQ2_3: Q2.3 R1.2
NetQ3_1: Q3.1 R10.1 R17.2
NetQ3_3: Q3.3 R2.2
NetQ4_1: Q4.1 R11.1 R18.2
NetQ4_3: Q4.3 R3.2
NetQ5_1: Q5.1 R12.1 R19.2
NetQ5_3: Q5.3 R4.2
NetQ6_1: Q6.1 R13.1 R20.2
NetQ6_3: Q6.3 R5.2
NetQ7_1: Q7.1 R14.1 R21.2
NetQ7_3: Q7.3 R6.2
NetQ8_1: Q8.1 R15.1 R22.2
NetQ8_3: Q8.3 R7.2
NetR1_1: R1.1 SW1.2 SW9.2 SW17.2 SW25.2 SW33.2 SW41.2 SW49.2 SW57.2 U2.4
NetR2_1: R2.1 SW2.2 SW10.2 SW18.2 SW26.2 SW34.2 SW42.2 SW50.2 SW58.2 U2.3
NetR3_1: R3.1 SW3.2 SW11.2 SW19.2 SW27.2 SW35.2 SW43.2 SW51.2 SW59.2 U2.2
NetR4_1: R4.1 SW4.2 SW12.2 SW20.2 SW28.2 SW36.2 SW44.2 SW52.2 SW60.2 U2.1
NetR5_1: R5.1 SW5.2 SW13.2 SW21.2 SW29.2 SW37.2 SW45.2 SW53.2 SW61.2 U2.15
NetR6_1: R6.1 SW6.2 SW14.2 SW22.2 SW30.2 SW38.2 SW46.2 SW54.2 SW62.2 U2.14
NetR7_1: R7.1 SW7.2 SW15.2 SW23.2 SW31.2 SW39.2 SW47.2 SW55.2 SW63.2 U2.13
NetR8_1: R8.1 SW8.2 SW16.2 SW24.2 SW32.2 SW40.2 SW48.2 SW56.2 SW64.2 U2.12
NetR9_2: R9.2 U3.15
NetR10_2: R10.2 U3.14
NetR11_2: R11.2 U3.13
NetR12_2: R12.2 U3.12
NetR13_2: R13.2 U3.11
NetR14_2: R14.2 U3.10
NetR15_2: R15.2 U3.9
NetR16_2: R16.2 U3.7
NetR27_1: R27.1 X1.A5
NetR28_1: R28.1 X1.B5
NetSW1_1: SW1.1 SW2.1 SW3.1 SW4.1 SW5.1 SW6.1 SW7.1 SW8.1 U1.15
NetSW9_1: SW9.1 SW10.1 SW11.1 SW12.1 SW13.1 SW14.1 SW15.1 SW16.1 U1.14
NetSW17_1: SW17.1 SW18.1 SW19.1 SW20.1 SW21.1 SW22.1 SW23.1 SW24.1 U1.13
NetSW25_1: SW25.1 SW26.1 SW27.1 SW28.1 SW29.1 SW30.1 SW31.1 SW32.1 U1.12
NetSW33_1: SW33.1 SW34.1 SW35.1 SW36.1 SW37.1 SW38.1 SW39.1 SW40.1 U1.11
NetSW41_1: SW41.1 SW42.1 SW43.1 SW44.1 SW45.1 SW46.1 SW47.1 SW48.1 U1.10
NetSW49_1: SW49.1 SW50.1 SW51.1 SW52.1 SW53.1 SW54.1 SW55.1 SW56.1 U1.9
NetSW57_1: SW57.1 SW58.1 SW59.1 SW60.1 SW61.1 SW62.1 SW63.1 SW64.1 U1.7
NetU5_2: U5.2 W3.1
NetU5_6: U5.6 W4.1
NetU6_2: U6.2 U7.4
NetU7_2: U7.2 U8.4
NetU8_2: U8.2 U9.4
NetU9_2: U9.2 U10.4
NetU10_2: U10.2 U11.4
NetU11_2: U11.2 U12.4
NetU12_2: U12.2 U13.4
NetU13_2: U13.2 U14.4
NetU14_2: U14.2 U15.4
NetU15_2: U15.2 U16.4
NetU16_2: U16.2 U17.4
NetU17_2: U17.2 U18.4
NetU18_2: U18.2 U19.4
NetU19_2: U19.2 U20.4
NetU20_2: U20.2 U21.4
NetU21_2: U21.2 U22.4
NetU22_2: U22.2 U23.4
NetU23_2: U23.2 U24.4
NetU24_2: U24.2 U25.4
NetU25_2: U25.2 U26.4
NetU26_2: U26.2 U27.4
NetU27_2: U27.2 U28.4
NetU28_2: U28.2 U29.4
NetU29_2: U29.2 U30.4
NetU30_2: U30.2 U31.4
NetU31_2: U31.2 U32.4
NetU32_2: U32.2 U33.4
NetU33_2: U33.2 U34.4
NetU34_2: U34.2 U35.4
NetU35_2: U35.2 U36.4
NetU36_2: U36.2 U37.4
NetU37_2: U37.2 U38.4
NetU38_2: U38.2 U39.4
NetU39_2: U39.2 U40.4
NetU40_2: U40.2 U41.4
NetU41_2: U41.2 U42.4
NetU42_2: U42.2 U43.4
NetU43_2: U43.2 U44.4
NetU44_2: U44.2 U45.4
NetU45_2: U45.2 U46.4
NetU46_2: U46.2 U47.4
NetU47_2: U47.2 U48.4
NetU48_2: U48.2 U49.4
NetU49_2: U49.2 U50.4
NetU50_2: U50.2 U51.4
NetU51_2: U51.2 U52.4
NetU52_2: U52.2 U53.4
NetU53_2: U53.2 U54.4
NetU54_2: U54.2 U55.4
NetU55_2: U55.2 U56.4
NetU56_2: U56.2 U57.4
NetU57_2: U57.2 U58.4
NetU58_2: U58.2 U59.4
NetU59_2: U59.2 U60.4
NetU60_2: U60.2 U61.4
NetU61_2: U61.2 U62.4
NetU62_2: U62.2 U63.4
NetU63_2: U63.2 U64.4
NetU64_2: U64.2 U65.4
NetU65_2: U65.2 U66.4
NetU66_2: U66.2 U67.4
NetU67_2: U67.2 U68.4
NetU68_2: U68.2 U69.4
NetU70_4: U70.4 W5.2
NetU70_5: U70.5 W8.1
NRST: P8.4 R34.1 U70.6
READ: P6.1 U2.5 U70.15
ROW0: P7.1 U1.1 U70.11
ROW1: P7.2 U1.2 U70.12
ROW2: P7.3 U1.3 U70.13
SWCLK: P8.1 R36.2 U70.19
SWIO: P8.2 U70.18
U2CTS: P3.4 W3.2
U2RTS: P3.3 U70.8 W4.2
U2RX: P3.1 U5.1 W7.2
U2TX: P3.2 U5.4 W6.2
USART2_CTS: U70.7
USART2_RX: U70.10 W7.1
USART2_TX: U70.9 W6.1
VBUS_5V: L1.1 P2.5 R31.2 U5.12
pads on no net: U2.6 U5.7 U5.14 U5.15 U5.16 U69.2 X1. X1.A8 X1.B8 X1.S1 X1.S2 X1.S3 X1.S4

## Silkscreen, mask and mechanical layers (free items; w line width, h text height)
Top Overlay:
  lines w0.254: 0,243 11,243 ; 11,98 40,98 ; 11,127 40,127 ; 11,156 40,156 ; 11,185 40,185 ; 11,214 40,214 ; 11,254 11,243 ; 11,11 40,11 ; 11,40 40,40 ; 11,69 40,69 ; 40,243 40,214 ; 69,243 69,214 ; 98,243 98,214 ; 127,243 127,214 ; 156,243 156,214 ; 185,243 185,214 ; 214,243 214,214 ; 243,40 214,40 ; 243,69 214,69 ; 243,98 214,98 ; 243,127 214,127 ; 243,156 214,156 ; 243,185 214,185 ; 11,243 11,11 243,11 ; 11,243 243,243 ; 40,11 40,40 ; 40,11 69,11 ; 40,40 40,69 ; 40,40 69,40 ; 40,69 40,98 ; 40,69 69,69 ; 40,98 40,127 ; 40,98 69,98 ; 40,127 40,156 ; 40,127 69,127 ; 40,156 40,185 ; 40,156 69,156 ; 40,185 40,214 ; 40,185 69,185 ; 40,214 69,214 ; 69,11 69,40 ; 69,11 98,11 ; 69,40 69,69 ; 69,40 98,40 ; 69,69 69,98 ; 69,69 98,69 ; 69,98 69,127 ; 69,98 98,98 ; 69,127 69,156 ; 69,127 98,127 ; 69,156 69,185 ; 69,156 98,156 ; 69,185 69,214 ; 69,185 98,185 ; 69,214 98,214 ; 98,11 98,40 ; 98,11 127,11 ; 98,40 98,69 ; 98,40 127,40 ; 98,69 98,98 ; 98,69 127,69 ; 98,98 98,127 ; 98,98 127,98 ; 98,127 98,156 ; 98,127 127,127 ; 98,156 98,185 ; 98,156 127,156 ; 98,185 98,214 ; 98,185 127,185 ; 98,214 127,214 ; 127,11 127,40 ; 127,11 156,11 ; 127,40 127,69 ; 127,40 156,40 ; 127,69 127,98 ; 127,69 156,69 ; 127,98 127,127 ; 127,98 156,98 ; 127,127 127,156 ; 127,127 156,127 ; 127,156 127,185 ; 127,156 156,156 ; 127,185 127,214 ; 127,185 156,185 ; 127,214 156,214 ; 156,11 156,40 ; 156,11 185,11 ; 156,40 156,69 ; 156,40 185,40 ; 156,69 156,98 ; 156,69 185,69 ; 156,98 156,127 ; 156,98 185,98 ; 156,127 156,156 ; 156,127 185,127 ; 156,156 156,185 ; 156,156 185,156 ; 156,185 156,214 ; 156,185 185,185 ; 156,214 185,214 ; 185,11 185,40 ; 185,11 214,11 ; 185,40 185,69 ; 185,40 214,40 ; 185,69 185,98 ; 185,69 214,69 ; 185,98 185,127 ; 185,98 214,98 ; 185,127 185,156 ; 185,127 214,127 ; 185,156 185,185 ; 185,156 214,156 ; 185,185 185,214 ; 185,185 214,185 ; 185,214 214,214 ; 214,11 214,40 ; 214,11 243,11 ; 214,40 214,69 ; 214,69 214,98 ; 214,98 214,127 ; 214,127 214,156 ; 214,156 214,185 ; 214,185 214,214 ; 214,214 243,214 243,243 ; 243,11 243,243
Board Outline (ES):
  the board outline again, w0.254

## Text inside footprints (layer, text, board x,y; h text height)
P2: Top Overlay "6" at 249.548,155.35 h1.27 r90; Top Overlay "5" at 252.088,155.35 h1.27 r90; Top Overlay "2" at 249.548,146.206 h1.27 r90; Top Overlay "1" at 252.088,146.714 h1.27 r90
X1: Top 3D Body "PCB EDGE" at 253.08,218.4 h0.41 r90